# EAGLE board backpac_a (EAGLE 5.12)
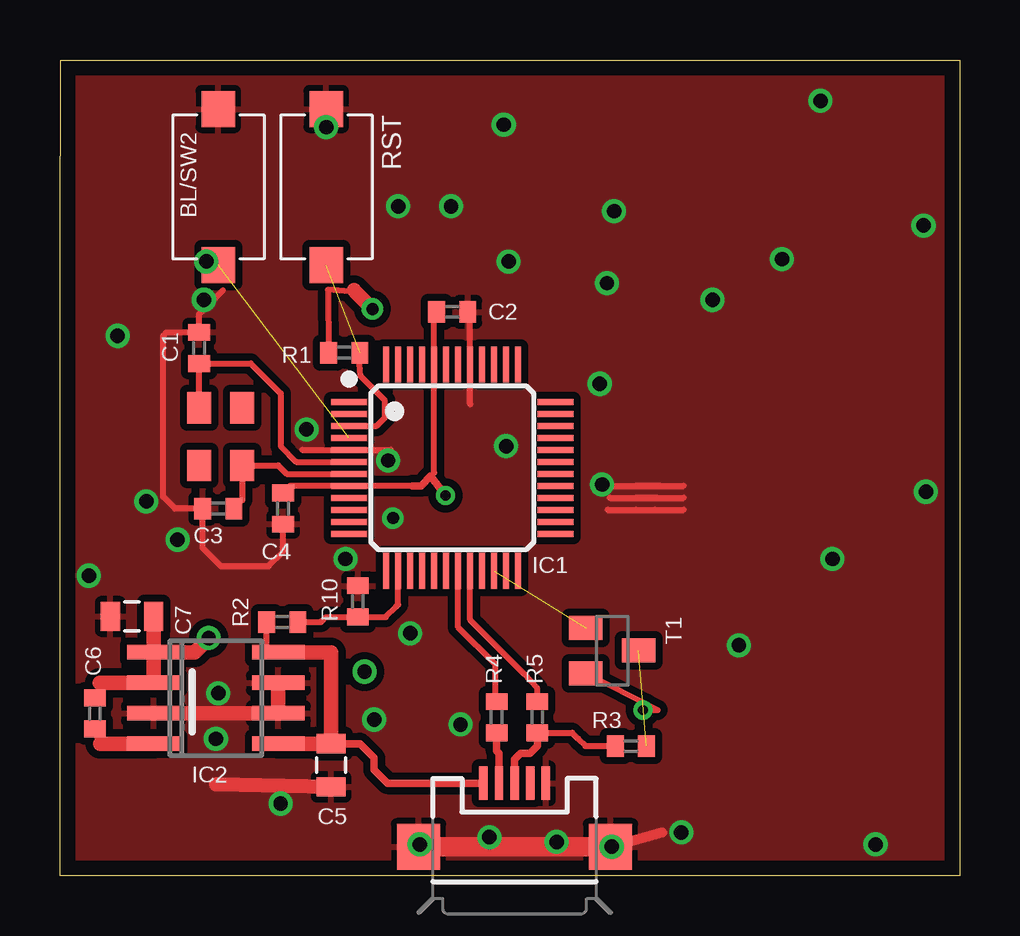
[diagram p0: board, top side]
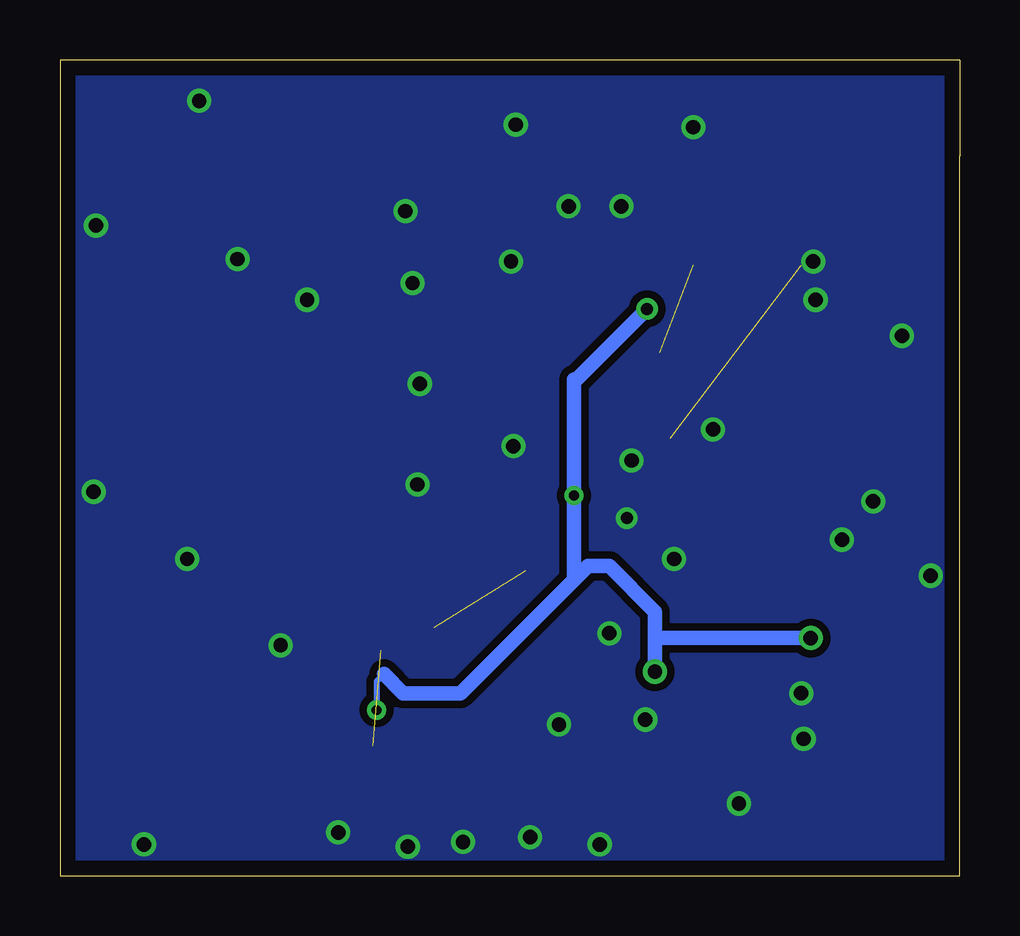
[diagram p1: board, bottom side, seen from below]

Size 37.5 x 34 mm. Coordinates in mm from the lower left corner, seen from the top.
Outline: 37.5,34 37.5,0 3.5,0 0,0 0,4 0,30 0,34 3.5,34 37.5,34
Copper layers (1*16): Top 0.035mm / dielectric 1.5mm / Bottom 0.035mm
Design rules "default *": minimum track width 9mil, minimum drill 0.4mm, track to track 8mil, track to pad 8mil, pad to pad 8mil, via to via 8mil, smd to smd 8mil, copper to edge 25mil, drill to drill 8mil, minimum pad ring 10mil, minimum via ring 8mil, stop-mask expansion 4mil, vias tented up to drill 30mil, thermal gap 10mil

## Footprints (pad centres in the part's own frame; a part is rotated, then mirrored left to right if it is on the bottom)
SWITCH_MCTAEF = smd 1.5 x 1.4: 1 -3.25,0; 2 3.25,0
C0402 = smd 0.7 x 0.9: 1 -0.65,0; 2 0.65,0
0805 = smd 0.8 x 1.2: 1 -0.9,0; 2 0.9,0
LQFP48 = smd 1.5 x 0.25: 1 -4.3,2.75; 2 -4.3,2.25; 3 -4.3,1.75; 4 -4.3,1.25; 5 -4.3,0.75; 6 -4.3,0.25; 7 -4.3,-0.25; 8 -4.3,-0.75; 9 -4.3,-1.25; 10 -4.3,-1.75; 11 -4.3,-2.25; 12 -4.3,-2.75; 25 4.3,-2.75; 26 4.3,-2.25; 27 4.3,-1.75; 28 4.3,-1.25; 29 4.3,-0.75; 30 4.3,-0.25; 31 4.3,0.25; 32 4.3,0.75; 33 4.3,1.25; 34 4.3,1.75; 35 4.3,2.25; 36 4.3,2.75 | smd 0.25 x 1.5: 13 -2.75,-4.3; 14 -2.25,-4.3; 15 -1.75,-4.3; 16 -1.25,-4.3; 17 -0.75,-4.3; 18 -0.25,-4.3; 19 0.25,-4.3; 20 0.75,-4.3; 21 1.25,-4.3; 22 1.75,-4.3; 23 2.25,-4.3; 24 2.75,-4.3; 37 2.75,4.3; 38 2.25,4.3; 39 1.75,4.3; 40 1.25,4.3; 41 0.75,4.3; 42 0.25,4.3; 43 -0.25,4.3; 44 -0.75,4.3; 45 -1.25,4.3; 46 -1.75,4.3; 47 -2.25,4.3; 48 -2.75,4.3
SOIC8 = smd 0.6 x 2.2: 1 -1.905,-2.6; 2 -0.635,-2.6; 3 0.635,-2.6; 4 1.905,-2.6; 5 1.905,2.6; 6 0.635,2.6; 7 -0.635,2.6; 8 -1.905,2.6
MT = smd 1.3 x 1: 1 1.2,0.9; 2 -1.2,0.9; 3 -1.2,-0.9; 4 1.2,-0.9
R0402 = smd 0.7 x 0.9: 1 -0.65,0; 2 0.65,0
SOT23 = smd 1 x 1.4: 1 -0.95,-1.1; 2 0.95,-1.1; 3 0,1.1
USB-MICROB = smd 0.35 x 1.4: D+ 0,2.65; D- -0.65,2.65; GND 1.3,2.65; ID 0.65,2.65; VBUS -1.3,2.65 | smd 1.8 x 1.9: MT1 -4,0; MT2 4,0; MT3 -4,0; MT4 4,0

## Placement (x,y rotation side)
BL/SW2  SWITCH_MCTAEF  [SWITCH_MCTAEF]  6.6,28.7 270 top
C1  22pF  [C0402]  5.8,22 270 top
C2  100nF  [C0402]  16.35,23.5 180 top
C3  22pF  [C0402]  6.6,15.3 0 top
C4  100nF  [C0402]  9.3,15.3 90 top
C5  1µF  [0805]  11.3,4.6 270 top
C6  10nF  [C0402]  1.46,6.76 90 top
C7  1µF  [0805]  3,10.8 180 top
IC1  [LQFP48]  16.35,17 0 top
IC2  LT1763CS8-3.3  [SOIC8]  6.5,7.4 270 top
Q1  12Mhz  [MT]  6.7,18.3 270 top
R1  15k  [R0402]  11.85,21.8 180 top
R2  15k  [R0402]  9.27,10.57 180 top
R3  15k  [R0402]  23.8,5.4 0 top
R4  33R  [R0402]  18.2,6.6 270 top
R5  33R  [R0402]  19.9,6.6 270 top
R10  15k  [R0402]  12.42,11.43 90 top
RST  SWITCH_MCTAEF  [SWITCH_MCTAEF]  11.1,28.7 270 top
T1  BSS84  [SOT23]  23.02,9.38 270 top
X1  USB-MICROB  [USB-MICROB]  18.95,1.2 0 top

## Library data of the parts
BL/SW2 Q1 RST = seb
C1-C4 C6 R1-R5 R10 = rcl
C5 C7 X1 = SparkFun
IC1 = microbuilder; DIGIKEY#: 568-4945-ND; MANF: NXP; MANF#: LPC1343FBD48,151
IC2 = linear-technology
T1 = transistor-small-signal

## Nets
+3V3: C2.2 C4.2 C6.2 C7.1 IC1.8 IC1.44 IC2.1 IC2.2 R1.2 T1.2
+5V: C5.1 IC2.5 IC2.8 R2.2 X1.VBUS
GND: BL/SW2.1 C1.1 C2.1 C3.1 C4.1 C5.2 C7.2 IC1.5 IC1.41 IC2.3 IC2.6 IC2.7 R10.2 RST.1 X1.GND X1.MT1 X1.MT2 X1.MT3 X1.MT4
N$3: C3.2 IC1.7 Q1.1
N$4: C1.2 IC1.6 Q1.3
N$5: C6.1 IC2.4
N$7: IC1.3 R1.1 RST.2
N$8: R3.2 T1.3
N$9: IC1.22 T1.1
N$10: R3.1 R5.2 X1.D+
N$11: R4.2 X1.D-
N$12: IC1.14 R2.1 R10.1
N$14: IC1.19 R4.1
N$21: BL/SW2.2 IC1.4
N$24: IC1.20 R5.1
PWM0: IC1.27
PWM1: IC1.28
PWM2: IC1.29
SCL: IC1.15
SDA: IC1.16

## Tracks (layer width: path | path; a pad name or v marks a point on that pad's centre or on a via)
+3V3  (via drill 0.4, 0.5, 0.6)
  Top 0.254: C2.2 15.6,23.4 IC1.44 15.6,16.8 15.05,16.25 | C4.2 9.6,16.25 IC1.8 14.7,16.25 | R1.2 11.18,24.43 12.32,24.32 | C6.2 1.65,7.45 1.65,8.04 | T1.2 24.91,6.9 v24.3,6.9
  Top 0.305: 14.7,16.25 15.05,16.25 15.44,16.65 v16.07,15.85
  Top 0.61: IC2.1 4,9.3 | 1.65,8.04 IC2.2 IC2.1 | IC2.1 C7.1 | 12.25,24.4 12.32,24.32 v13.03,23.62 | v6.2,9.9 5.61,9.3 IC2.1
  Bottom 0.254: v24.3,6.9 24.3,8.1 24,8.4
  Bottom 0.61: 24,8.4 23.2,7.6 20.8,7.6 16.07,12.33 | 16.07,12.33 v16.07,15.85 16.07,20.67 16.08,20.57 v13.03,23.62 | v6.2,9.9 12.7,9.9 | 12.7,9.9 v12.7,8.5 | 16.07,12.33 15.5,12.9 14.6,12.9 12.7,11 12.7,9.9
+5V
  Top 0.254: R2.2 8.62,9.3 IC2.8
  Top 0.305: X1.VBUS 13.65,3.85 13.1,4.4 13.1,4.9 12.8,5.2 12.5,5.5 C5.1
  Top 0.35: 10.9,5.5 11.25,5.85
  Top 0.61: C5.1 9.2,5.5 IC2.5 10.9,5.5 C5.1 | C5.1 11.3,9.3 IC2.8
GND  (via drill 0.5, 0.6)
  Top 0.254: 17.1,19.65 IC1.41 17.1,23.4 C2.1 | C4.1 9.3,13.5 8.7,12.9 6.7,12.9 5.95,13.65 C3.1 4.8,15.3 4.3,15.8 4.3,22.5 4.45,22.65 C1.1 5.8,23.4 6.8,24.4 | 10.1,17.75 IC1.5 13.8,17.75 13.45,17.3 v13.68,17.3 | 25,16.25 26,16.25 | 25,16.25 24.02,16.25 | 24.9,15.75 26,15.75 | 24.9,15.75 24.02,15.75 | 24.8,15.25 26,15.25 | 24.02,15.25 24.8,15.25 | 24.02,15.25 24.8,15.25 | 22.82,15.25 24.02,15.25 | 22.93,15.75 24.9,15.75 | 23.02,16.25 25,16.25
  Top 0.406: X1.MT4 25.1,1.8
  Top 0.61: 6.5,3.8 C5.2 | IC2.3 IC2.6 IC2.7
  Top 0.813: X1.MT1 17.5,1.2 21.8,1.2 X1.MT4
  other vias: 31.7,32.3 30.1,25.7 11.1,31.2 6.1,25.6 6,24 18.5,31.3 4.9,14 11.9,13.2 6.6,7.6 6.5,5.7 17.9,1.6 20.7,1.4 34,1.3 36,27.1 27.2,24 22.8,24.7 13.88,14.9 22.5,20.5 16.7,6.3 23,1.2 15,1.3 36.1,16 13.1,6.5 23.1,27.7 10.28,18.6 14.6,10.1 32.2,13.2 16.3,27.9 14.1,27.9 28.3,9.6 1.2,12.5 3.6,15.6 22.6,16.3 18.6,17.9 25.9,1.8 9.2,3 2.4,22.5 18.7,25.6
  pour Top (isolate 0.305): 38,34.5 0,34.5 0,-0.5 38,-0.5
  pour Bottom (isolate 0.305): 38,34.5 0,34.5 0,-0.5 38,-0.5
N$3
  Top 0.254: IC1.7 9.45,16.75 9.1,17.1 Q1.1 7.6,15.65 C3.2
N$4
  Top 0.254: IC1.6 9.85,17.25 9.2,17.9 9.2,20.1 7.95,21.35 C1.2 Q1.3
N$5
  Top 0.254: C6.1 1.4,5.95 1.77,5.5
  Top 0.61: IC2.4 1.77,5.5 1.68,5.5
N$7  (1 unrouted)
  Top 0.254: IC1.3 13.2,18.75 13.55,19.1 13.55,19.8 12.53,20.82 12.47,21.57 R1.1
N$8  (1 unrouted)
N$9  (1 unrouted)
N$10
  Top 0.254: R3.1 21.9,5.4 21.6,5.7 21.35,5.95 R5.2
  Top 0.305: X1.D+ 18.95,4.85 19.2,5.1 19.6,5.1 19.8,5.3 19.9,5.4 R5.2
N$11
  Top 0.305: X1.D- 18.3,5.1 18.2,5.2 R4.2
N$12
  Top 0.254: R2.1 10.87,10.57 10.9,10.6 11.08,10.78 R10.1 13.58,10.78 14,11.2 14.1,11.3 IC1.14
N$14
  Top 0.254: R4.1 18.15,7.55 18.15,8.8 16.6,10.35 IC1.19
N$21  (1 unrouted)
N$24
  Top 0.254: IC1.20 17.1,10.65 19.35,8.4 19.9,7.8 R5.1

## Text on the board
tValues: LPC1343 | 12Mhz
bStop: seb@exse.net | oled module v1